# Altium PCB merigold_v3.PcbDoc
Units mm, origin at the board's own origin, x right, y up, seen from the top; angles counter-clockwise.
Board outline 99.57 x 99.57 mm, 2 copper layers (Top Layer, Bottom Layer); 21 components, 39 nets, 142 pads, 209 vias.
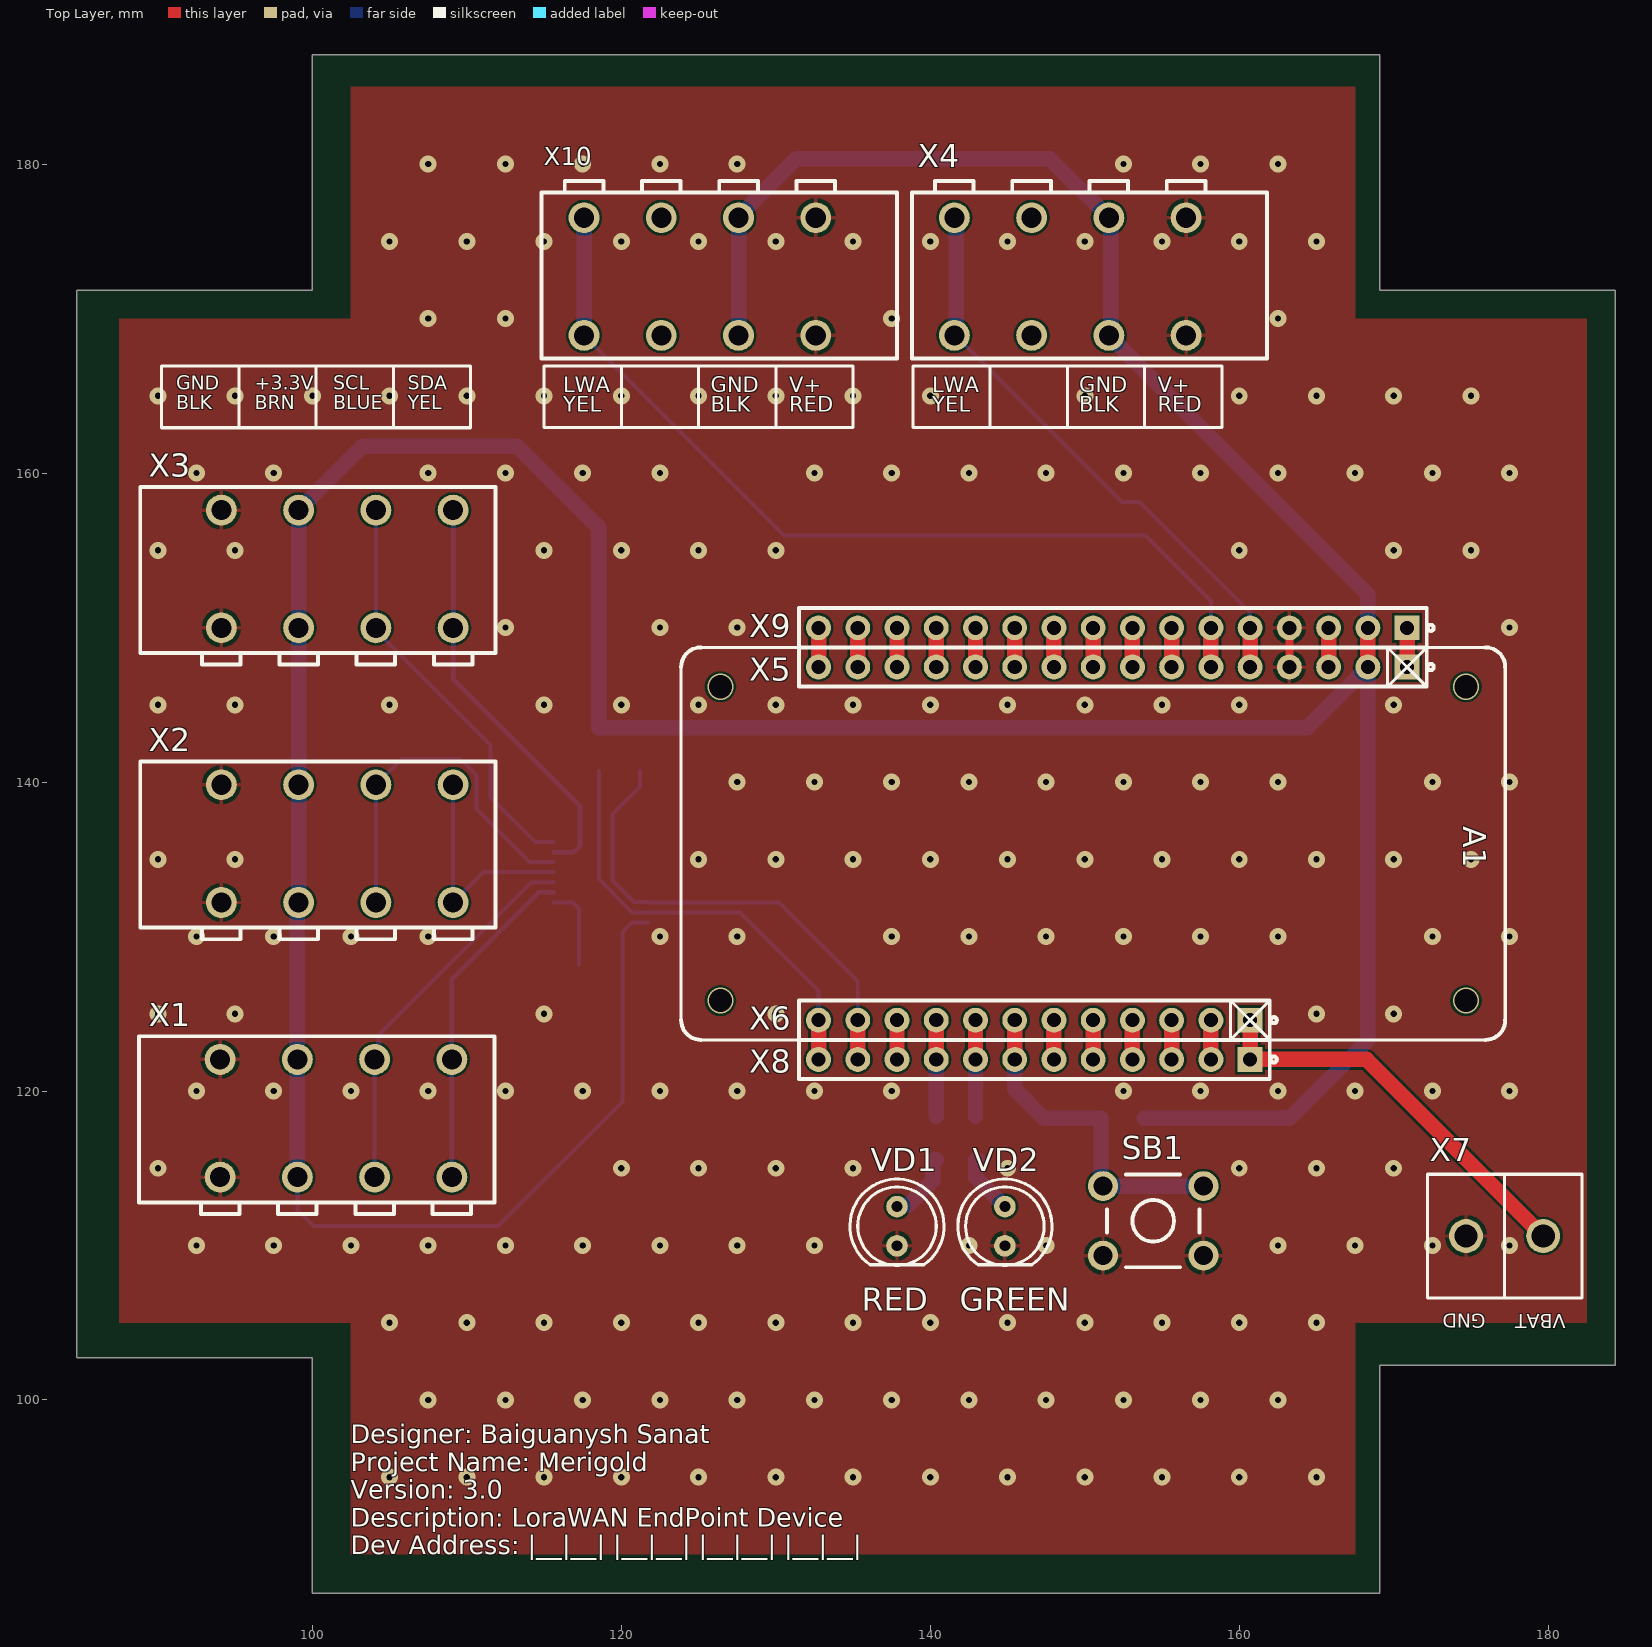
[diagram p0: Top Layer view]
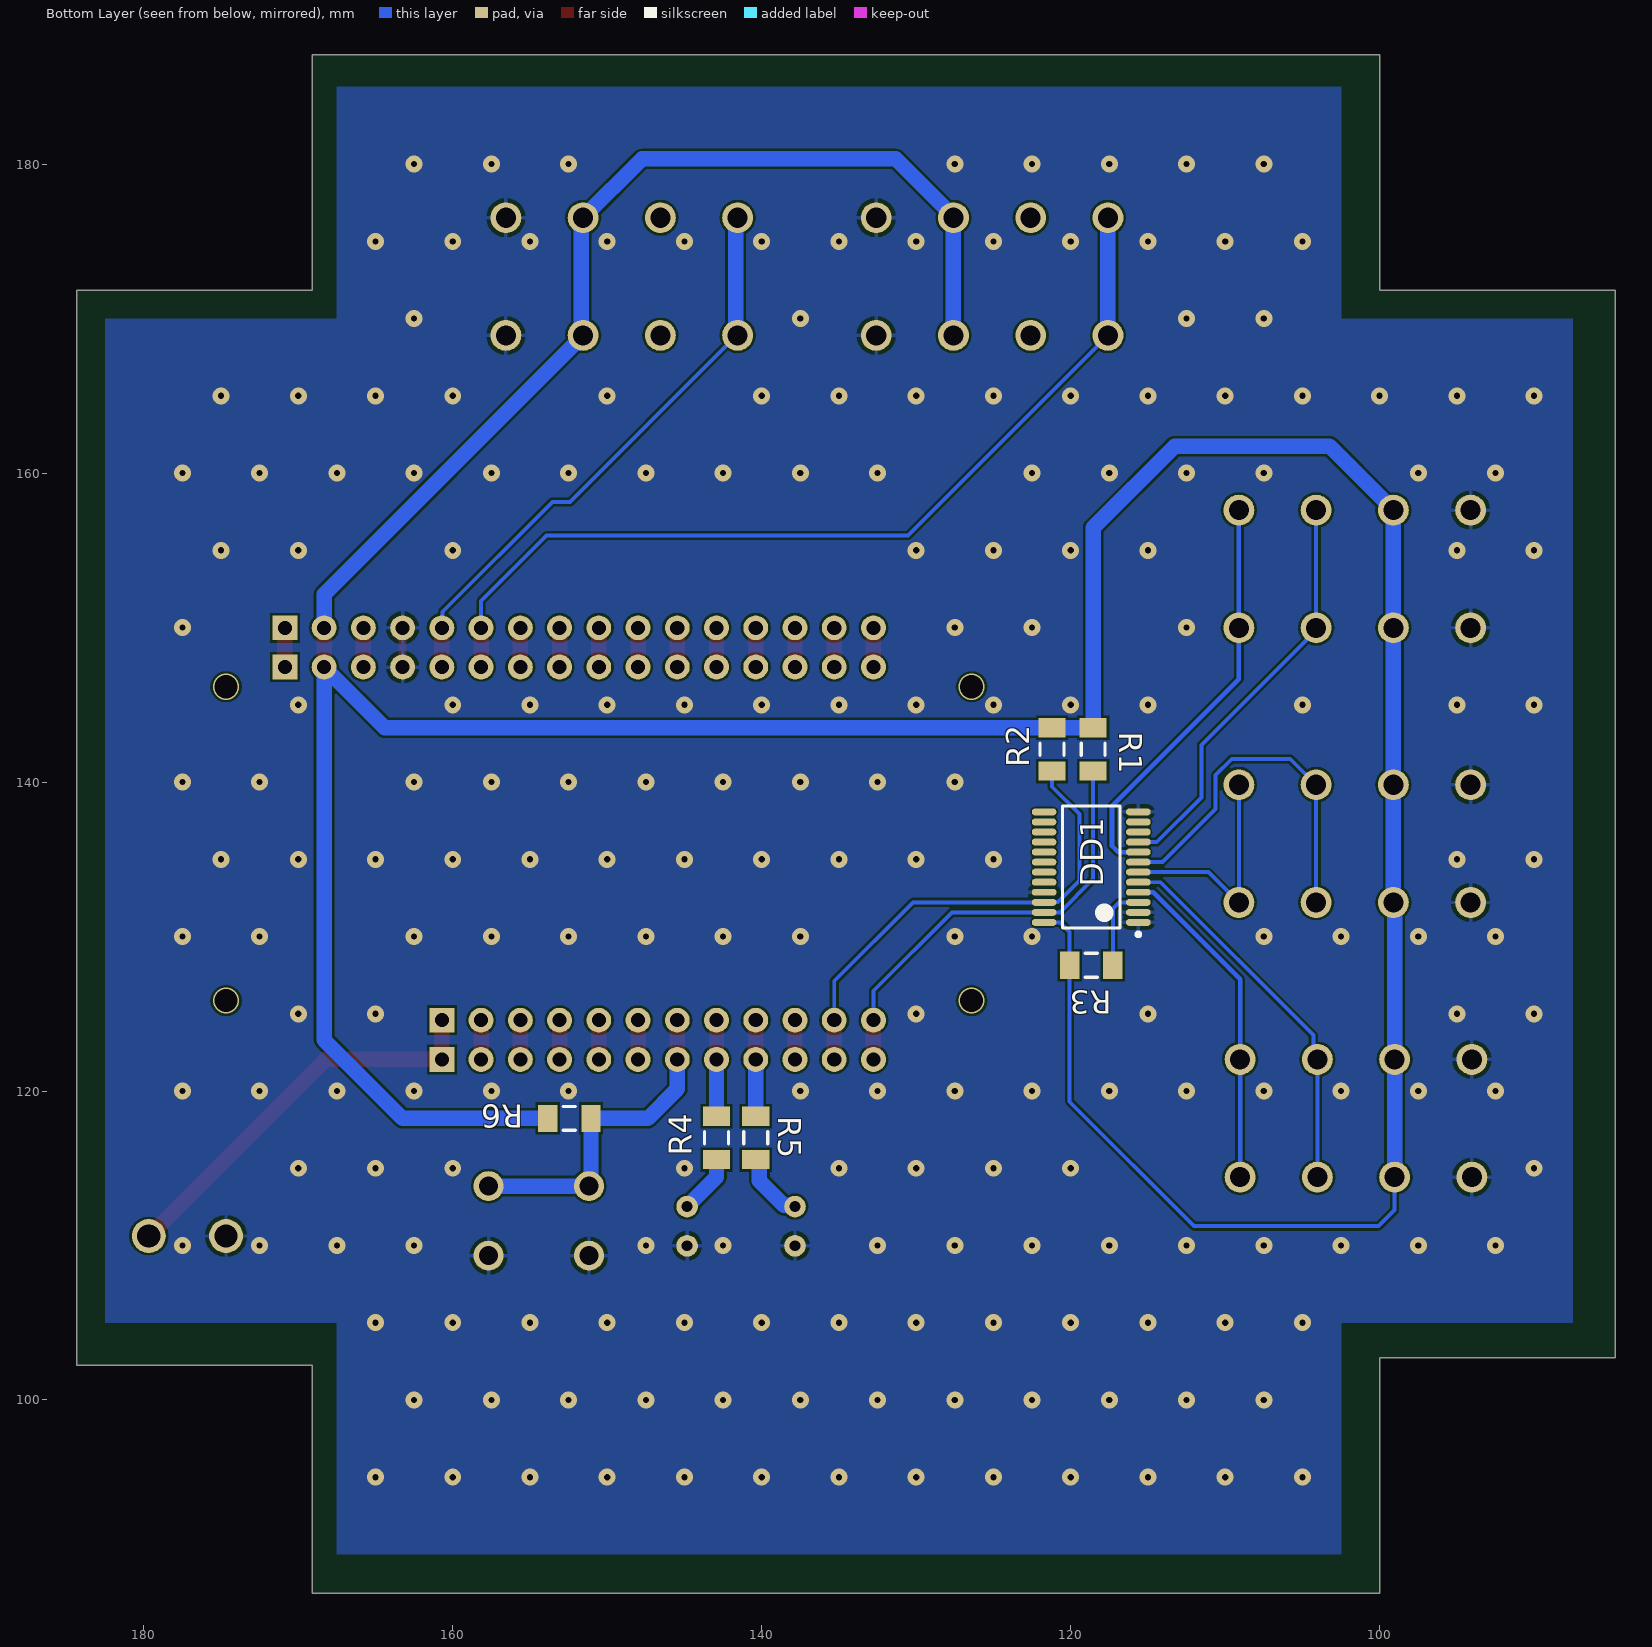
[diagram p1: Bottom Layer view, seen from below]

## Layer stack, top to bottom
Top Solder: solder mask 0.0102, Solder Resist, Dk 3.5
Top Layer: signal copper 0.0356
Dielectric 1: dielectric 0.32, FR-4, Dk 4.8
Bottom Layer: signal copper 0.0356
Bottom Solder: solder mask 0.0102, Solder Resist, Dk 3.5

## Board outline
84.76,102.74 100,102.74 100,87.5 169.088,87.5 169.088,102.232 184.328,102.232 184.328,171.828 169.088,171.828 169.088,187.068 100,187.068 100,171.828 84.76,171.828

## Design rules (kind name [scope] priority, off if disabled: settings)
Clearance Clearance_TSSOP [HasFootprint('TSOP65P640X120-24M')] p1: gap=0.1 ignorepadtopadclearanceinfootprint=FALSE
Clearance [All] p2: gap=0.15 ignorepadtopadclearanceinfootprint=FALSE
PlaneConnect [All] p1: pad.planeconnectstyle=Relief pad.reliefexpansion=0.508 pad.reliefentries=4 pad.reliefconductorwidth=0.254 pad.reliefairgap=0.254 via.planeconnectstyle=Direct via.reliefexpansion=0.508 via.reliefentries=4 via.reliefconductorwidth=0.254 via.reliefairgap=0.254
PolygonConnect [All] p1: thpad.connectstyle=Relief thpad.reliefconductorwidth=0.254 thpad.reliefentries=4 thpad.polygonreliefangle="90 Angle" thpad.airgapwidth=0.254 smdpad.connectstyle=Relief smdpad.reliefconductorwidth=0.254 smdpad.reliefentries=4 smdpad.polygonreliefangle="90 Angle" smdpad.airgapwidth=0.254 via.connectstyle=Direct via.reliefconductorwidth=0.254 via.reliefentries=4 via.polygonreliefangle="90 Angle" via.airgapwidth=0.254
RoomDefinition merigold [InComponentClass('merigold')] p1: confinementstyle=ConfineIn formatcopy=TRUE lockcomponents=FALSE outline 74.117,79.499 191.237,79.499 191.237,193.113 74.117,193.113
RoutingVias [All] p1: holewidth=0.711 width=1.27 viastyle="Through Hole" minholewidth=0.4 minwidth=1.1 maxholewidth=0.711 maxwidth=1.27
SolderMaskExpansion [All] p1: expansion=0.102 istentingtop=FALSE
Width [All] p1: maxlimit=5 minlimit=0.254 preferedwidth=0.254
29 further rules are at their usual default settings.

## Components (designator, comment, footprint, x,y, rotation, side; value= is the part's Value field where it differs from the comment)
A1 "LORA32U4 II" "LORA32U4 II" 170.866,147.444 r270 top
DD1 "TCA9548A" TSOP65P640X120-24M 118.669,134.49 r0 bottom
R1 "10K1206" RESC3216X07N/1206 118.542,142.11 r90 bottom
R2 "10K1206" RESC3216X07N/1206 121.209,142.11 r90 bottom
R3 "10K1206" RESC3216X07N/1206 118.669,128.14 r0 bottom
R4 "200R1206" RESC3216X07N/1206 142.926,116.964 r90 bottom
R5 "200R1206" RESC3216X07N/1206 140.386,116.964 r90 bottom
R6 "10K1206" RESC3216X07N/1206 152.451,118.234 r0 bottom
SB1 "BTN_TACTILE_6X6" BTN_TACTILE_6X6 157.681,109.344 r180 top
VD1 "LED_SSL-LX5093GD-TR26" LED500 137.846,112.519 r270 top
VD2 "LED_SSL-LX5093GD-TR26" LED500 144.831,112.519 r270 top
X1 "MOLEX_0397000904" MOLEX_0397000904 109.031,122.044 r180 top
X2 "MOLEX_0397000904" MOLEX_0397000904 109.111,139.824 r180 top
X3 "MOLEX_0397000904" MOLEX_0397000904 109.111,157.604 r180 top
X4 "MOLEX_0397000904" MOLEX_0397000904 141.558,168.91 r0 top
X5 "PLS_16_FEMALE" PLS_16_FEMALE 170.866,147.444 r270 top
X6 "PLS_12_FEMALE" PLS_12_FEMALE 160.706,124.584 r270 top
X7 "2EDGV-5.0-02P" 2EDGV-5.0-02P 179.676,110.614 r180 top
X8 "PLS_12_FEMALE" PLS_12_FEMALE 160.706,122.044 r270 top
X9 "PLS_16_FEMALE" PLS_16_FEMALE 170.866,149.984 r270 top
X10 "MOLEX_0397000904" MOLEX_0397000904 117.588,168.91 r0 top

## Footprints (in the part's own frame and the unit in brackets; to place one, negate y for a bottom-side part, rotate by r counter-clockwise, add the part's x,y. Pads: shape width x height; smd on the part's side, far side on the other; paste and mask are expansions set on the pad)
2EDGV-5.0-02P [mm]
  round 2.2 hole 1.5: 1(0,0) 2(5,0)
  silkscreen extent -2.5,-4 7.5,4, body extent -2.5,-4 7.5,4, height 12
BTN_TACTILE_6X6 [mm] "SWITCH TACTILE SPST-NO 0.05A 24V"
  round 1.94 hole 1.24: 1(0,0) 2(6.5,0) 3(0,-4.5) 4(6.5,-4.5)
  silkscreen extent 0.25,-5.25 6.25,0.75, body extent 0.25,-5.25 6.25,0.75, height 8
LED500 [mm]
  round 1.4 hole 0.7: A(0,0) K(2.54,0)
  silkscreen extent -1.77,-3.05 3.81,3.05, body extent -1.73,-3 4.27,3, height 8.6
"LORA32U4 II" [mm]
  silkscreen extent -1.27,-46.99 24.13,6.35, body extent -1.27,-46.99 24.13,7.62, height 5
MOLEX_0397000904 [mm] "TERM BLK 4POS TOP ENTRY 5MM PCB"
  round 2 hole 1.3: 1(0,7.62) 1(0,0) 2(5,7.62) 2(5,0) 3(10,7.62) 3(10,0) 4(15,0) 4(15,7.62)
  silkscreen extent -2.75,-1.5 20.25,10, body extent -2.5,-1.25 20,10, height 14
PLS_12_FEMALE [mm]
  rect 1.61x1.61 hole 0.91: 1(0,0)
  round 1.61 hole 0.91: 2(0,-2.54) 3(0,-5.08) 4(0,-7.62) 5(0,-10.16) 6(0,-12.7) 7(0,-15.24) 8(0,-17.78) 9(0,-20.32) 10(0,-22.86) 11(0,-25.4) 12(0,-27.94)
  silkscreen extent -1.27,-29.21 1.27,1.72, body extent -1.27,-29.21 1.27,1.27, height 8.5
PLS_16_FEMALE [mm]
  rect 1.61x1.61 hole 0.91: 1(0,0)
  round 1.61 hole 0.91: 2(0,-2.54) 3(0,-5.08) 4(0,-7.62) 5(0,-10.16) 6(0,-12.7) 7(0,-15.24) 8(0,-17.78) 9(0,-20.32) 10(0,-22.86) 11(0,-25.4) 12(0,-27.94) 13(0,-30.48) 14(0,-33.02) 15(0,-35.56) 16(0,-38.1)
  silkscreen extent -1.27,-39.37 1.27,1.72, body extent -1.27,-39.37 1.27,1.27, height 8.5
RESC3216X07N/1206 [mm] "Chip Resistor, 2-Leads, Body 3,20x1,60mm, IPC Medium Density"
  rect 1.25x1.75 smd: 1(-1.4,0) 2(1.4,0)
  silkscreen extent -0.4,-0.77 0.4,0.77, body extent -1.68,-0.87 1.68,0.87, height 0.71
TSOP65P640X120-24M [mm] "TSOP, 24-Leads, Body 7,80x4,40mm, Pitch 0,65mm, IPC Low Density"
  oval 1.6x0.45 smd: 1(-3.05,3.575) 2(-3.05,2.925) 3(-3.05,2.275) 4(-3.05,1.625) 5(-3.05,0.975) 6(-3.05,0.325) 7(-3.05,-0.325) 8(-3.05,-0.975) 9(-3.05,-1.625) 10(-3.05,-2.275) 11(-3.05,-2.925) 12(-3.05,-3.575) 13(3.05,-3.575) 14(3.05,-2.925) 15(3.05,-2.275) 16(3.05,-1.625) 17(3.05,-0.975) 18(3.05,-0.325) 19(3.05,0.325) 20(3.05,0.975) 21(3.05,1.625) 22(3.05,2.275) 23(3.05,2.925) 24(3.05,3.575)
  silkscreen extent -3.17,-3.95 1.85,4.47, body extent -2.25,-3.95 2.25,3.95, height 1.2

## Part data
A1: "LORA 32U4 II 868MHZ", Manufacturer=BSFrance, Manufacturer Part Number="Lora32U4 II ver 1.2", TH=1
DD1: "IC I2C SW 8CH W/RESET 24TSSOP", Manufacturer="Texas Instruments", Manufacturer Part Number=TCA9548APWR
R1 R2 R3 R6: "RES SMD 10K OHM 1% 1/4W 1206", Manufacturer=Panasonic, Manufacturer Part Number=ERJ8ENF1002V, Rated Power="0.25 W", Resistance="10 kO", Tolerance (%)="±1 %"
R4 R5: "RES SMD 200 OHM 1% 1/4W 1206", Manufacturer="Vishay Dale", Manufacturer Part Number=CRCW1206200RFKEA
SB1: "SWITCH TACTILE SPST-NO 0.05A 24V", Manufacturer="TE Connectivity Alcoswitch", Manufacturer Part Number=1825910-6, Pole Throw Configuration=SPST
VD1 VD2: "LED GREEN DIFFUSED T-1 3/4 T/H", Manufacturer=Lumex, Manufacturer Part Number=SSL-LX5093GD-TR26
X1 X2 X3 X4 X10: "TERM BLK 4POS TOP ENTRY 5MM PCB", Manufacturer=Molex, Manufacturer Part Number=0397000904, Supplier Part Number 1=WM10641-ND, Supplier 1=Digi-Key
X5 X9: "CONN RCPT 16POS 0.1 GOLD PCB", Manufacturer="TE Connectivity AMP Connectors", Manufacturer Part Number=1-534237-4, TH=1
X6 X8: "CONN RCPT 12POS 0.1 GOLD PCB", Manufacturer="TE Connectivity AMP Connectors", Manufacturer Part Number=1-534237-0, TH=1
X7: "TERM BLOCK HDR 2POS VERT 5MM", Manufacturer="Phoenix Contact", Manufacturer Part Number=1753437

## Via types
v1: diameter 1.1, hole 0.4, Top Layer to Bottom Layer, tented both sides, 205 vias
v2: diameter 1.7, hole 1.5, Top Layer to Bottom Layer, 4 vias

## Nets (pads, with @x,y where several pads share a name; then routed paths per layer and width w, separated by ;. In a path a pad name is that pad's centre, name@x,y a point inside that pad or via, vN(x,y) a via of type N, cw(c..) or ccw(c..) an arc to the next point about the centre after c; other vN are vias at no path point)
+3V3: DD1.24 R1.2 R2.2 R3.2 R6.2 X1.3 X2.3 X3.3 X4.3 X5.2 X9.2 X10.3 | length 282.4
  Top Layer w1: X5.2 X9.2
  Bottom Layer w0.254: X1.3@99.031,114.424 99.031,112.297 100.076,111.252 112.014,111.252 120.069,119.307 R3.2 120.069,130.302 120.682,130.915 DD1.24
  Bottom Layer w1: X1.3@99.031,114.424 99.031,122.044 99.031,132.124 99.111,132.204 99.111,139.824 99.111,149.984 99.111,157.604 103.251,161.744 113.259,161.744 118.542,156.461 R1.2 R2.2 164.392,143.51 X5.2 168.326,123.314 163.246,118.234 R6.2 ; X10.3@127.588,168.91 127.588,176.53 127.588,176.61 131.318,180.34 147.748,180.34 X4.3@151.558,176.53 ; X4.3@151.558,168.91 168.326,152.142 X9.2 ; X4.3@151.689,168.653 X4.3@151.689,176.4
A1: X5.6 X9.6 X10.1 | length 59.6
  Top Layer w1: X5.6 X9.6
  Bottom Layer w0.254: X10.1@117.588,168.91 130.542,155.956 153.924,155.956 158.166,151.714 X9.6
  Bottom Layer w1: X10.1@117.588,168.91 X10.1@117.588,176.53
BTN: R6.1 SB1.3 SB1.4 X6.7 X8.7 | length 21.8
  Top Layer w1: X8.7 X6.7
  Bottom Layer w1: X8.7 145.466,120.139 147.371,118.234 R6.1 151.051,113.974 SB1.4 SB1.3
GND: DD1.1 DD1.2 DD1.12 DD1.21 SB1.1 SB1.2 VD1.K VD2.K X1.4 X2.4 X3.4 X4.4 X5.4 X7.2 X9.4 X10.4 | length 2.5
  Top Layer w0.5: X5.4 X9.4
  other v1: 105,95 110,95 115,95 120,95 125,95 130,95 135,95 140,95 145,95 150,95 155,95 160,95 165,95 107.5,100 112.5,100 117.5,100 122.5,100 127.5,100 132.5,100 137.5,100 142.5,100 147.5,100 152.5,100 157.5,100 162.5,100 105,105 110,105 115,105 120,105 125,105 130,105 135,105 140,105 145,105 150,105 155,105 160,105 165,105 92.5,110 97.5,110 102.5,110 107.5,110 112.5,110 117.5,110 122.5,110 127.5,110 132.5,110 142.5,110 147.5,110 162.5,110 167.5,110 172.5,110 177.5,110 90,115 120,115 125,115 130,115 135,115 145,115 160,115 165,115 170,115 92.5,120 97.5,120 102.5,120 107.5,120 112.5,120 117.5,120 122.5,120 127.5,120 132.5,120 137.5,120 152.5,120 157.5,120 162.5,120 167.5,120 172.5,120 177.5,120 90,125 95,125 115,125 130,125 165,125 170,125 92.5,130 97.5,130 102.5,130 107.5,130 122.5,130 127.5,130 137.5,130 142.5,130 147.5,130 152.5,130 157.5,130 162.5,130 172.5,130 177.5,130 90,135 95,135 125,135 130,135 135,135 140,135 145,135 150,135 155,135 160,135 165,135 170,135 175,135 127.5,140 132.5,140 137.5,140 142.5,140 147.5,140 152.5,140 157.5,140 162.5,140 172.5,140 177.5,140 90,145 95,145 105,145 115,145 120,145 125,145 130,145 135,145 140,145 145,145 150,145 155,145 160,145 170,145 112.5,150 122.5,150 127.5,150 177.5,150 90,155 95,155 115,155 120,155 125,155 130,155 160,155 170,155 175,155 92.5,160 97.5,160 107.5,160 112.5,160 117.5,160 122.5,160 132.5,160 137.5,160 142.5,160 147.5,160 152.5,160 157.5,160 162.5,160 167.5,160 172.5,160 177.5,160 90,165 95,165 100,165 105,165 110,165 115,165 120,165 125,165 130,165 135,165 140,165 150,165 160,165 165,165 170,165 175,165 107.5,170 112.5,170 137.5,170 162.5,170 105,175 110,175 115,175 120,175 125,175 130,175 135,175 140,175 145,175 150,175 155,175 160,175 165,175 107.5,180 112.5,180 117.5,180 122.5,180 127.5,180 152.5,180 157.5,180 162.5,180
GREEN: R4.2 X6.8 X8.8 | length 6.2
  Top Layer w1: X8.8 X6.8
  Bottom Layer w1: R4.2 X8.8
LEAF_WETNESS_ANALOG: X4.1 X5.5 X9.5 | length 37.7
  Top Layer w1: X5.5 X9.5
  Bottom Layer w0.254: X4.1@141.558,168.91 141.624,168.91 141.689,168.845 152.407,158.126 153.554,158.126 160.659,151.021 160.659,150.031 X9.5
  Bottom Layer w1: X4.1@141.689,168.78 141.689,168.845 X4.1@141.689,176.4
NetDD1_3: DD1.3 R3.1 | length 5.5
  Bottom Layer w0.254: DD1.3 116.88,132.215 117.269,131.826 R3.1
NetR4_1: R4.1 VD2.A | length 4.1
  Bottom Layer w1: R4.1@143.167,115.439 143.042,115.564 R4.1 142.926,114.424 VD2.A
NetR5_1: R5.1 VD1.A | length 4.5
  Bottom Layer w1: VD1.A 137.923,112.596 138.558,112.596 140.145,114.183 140.145,115.439 140.27,115.564 R5.1
NetX5_1: X5.1 X9.1 | length 2.5
  Top Layer w1: X5.1 X9.1
NetX5_3: X5.3 X9.3 | length 2.5
  Top Layer w1: X5.3 X9.3
NetX5_7: X5.7 X9.7 | length 2.5
  Top Layer w1: X5.7 X9.7
NetX5_8: X5.8 X9.8 | length 2.5
  Top Layer w1: X5.8 X9.8
NetX5_9: X5.9 X9.9 | length 2.5
  Top Layer w1: X5.9 X9.9
NetX5_10: X5.10 X9.10 | length 2.5
  Top Layer w1: X5.10 X9.10
NetX5_11: X5.11 X9.11 | length 2.5
  Top Layer w1: X5.11 X9.11
NetX5_12: X5.12 X9.12 | length 2.5
  Top Layer w1: X5.12 X9.12
NetX5_13: X5.13 X9.13 | length 2.5
  Top Layer w1: X5.13 X9.13
NetX5_14: X5.14 X9.14 | length 2.5
  Top Layer w1: X5.14 X9.14
NetX5_15: X5.15 X9.15 | length 2.5
  Top Layer w1: X5.15 X9.15
NetX5_16: X5.16 X9.16 | length 2.5
  Top Layer w1: X5.16 X9.16
NetX6_2: X6.2 X8.2 | length 2.5
  Top Layer w1: X8.2 X6.2
NetX6_3: X6.3 X8.3 | length 2.5
  Top Layer w1: X8.3 X6.3
NetX6_4: X6.4 X8.4 | length 2.5
  Top Layer w1: X8.4 X6.4
NetX6_5: X6.5 X8.5 | length 2.5
  Top Layer w1: X8.5 X6.5
NetX6_6: X6.6 X8.6 | length 2.5
  Top Layer w1: X8.6 X6.6
NetX6_10: X6.10 X8.10 | length 2.5
  Top Layer w1: X8.10 X6.10
RED: R5.2 X6.9 X8.9 | length 6.2
  Top Layer w1: X8.9 X6.9
  Bottom Layer w1: R5.2 X8.9
SCL: DD1.22 R2.1 X6.11 X8.11 | length 31.5
  Top Layer w1: X8.11 X6.11
  Bottom Layer w0.254: R2.1 121.209,139.697 119.431,137.919 119.431,133.622 120.817,132.237 121.697,132.237 DD1.22 130.215,132.215 135.306,127.124 X6.11
SCL0: DD1.5 X1.2 | length 24.7
  Bottom Layer w0.254: X1.2@104.031,114.424 104.031,122.044 104.293,122.306 104.293,123.619 114.189,133.515 DD1.5
SCL1: DD1.7 X2.2 | length 23.9
  Bottom Layer w0.254: X2.2@104.111,132.204 104.111,139.824 105.787,141.5 109.576,141.5 110.617,140.459 110.617,138.249 114.051,134.815 DD1.7
SCL2: DD1.9 X3.2 | length 27
  Bottom Layer w0.254: X3.2@104.111,157.604 104.111,149.984 104.111,149.81 111.532,142.389 111.532,139.011 114.428,136.115 DD1.9
SCL3: DD1.11
SDA: DD1.23 R1.1 X6.12 X8.12 | length 28.6
  Top Layer w1: X8.12 X6.12
  Bottom Layer w0.254: R1.1 118.542,133.728 120.705,131.565 DD1.23 127.69,131.565 132.766,126.489 X6.12
SDA0: DD1.4 X1.1 | length 21.7
  Bottom Layer w0.3: X1.1@109.031,114.424 109.031,122.044 109.031,127.24 114.656,132.865 DD1.4
SDA1: DD1.6 X2.1 | length 14.9
  Bottom Layer w0.254: X2.1@109.111,139.824 109.111,132.204 111.072,134.165 DD1.6
SDA2: DD1.8 X3.1 | length 27
  Bottom Layer w0.3: X3.1@109.111,157.604 109.111,149.984 109.111,146.664 117.323,138.452 117.323,135.862 116.926,135.465 DD1.8
SDA3: DD1.10
VBAT: X6.1 X7.1 X8.1 | length 26.2
  Top Layer w1: X6.1 X8.1 168.246,122.044 X7.1
pads on no net: DD1.13 DD1.14 DD1.15 DD1.16 DD1.17 DD1.18 DD1.19 DD1.20 X4.2 X10.2
copper on no net:
  other v2: 126.416,125.854 174.676,125.854 126.416,146.174 174.676,146.174

## Polygon pours and split planes (outlines as drawn)
GND on Bottom Layer "Top Overlay-No Net" (solid, pour order 0): 87.5,105 102.5,105 102.5,90 167.5,90 167.5,105 182.5,105 182.5,170 167.5,170 167.5,185 102.5,185 102.5,170 87.5,170
GND on Top Layer "Top Overlay-No Net" (solid, pour order 1): 87.5,105 102.5,105 102.5,90 167.5,90 167.5,105 182.5,105 182.5,170 167.5,170 167.5,185 102.5,185 102.5,170 87.5,170

## Silkscreen, mask and mechanical layers (free items; w line width, h text height)
Top Overlay:
  lines w0.2: 95.241,162.934 95.241,166.934 ; 100.241,162.934 100.241,166.934 ; 105.241,162.934 105.241,166.934 ; 120.002,162.937 120.002,166.937 ; 125.002,162.937 125.002,166.937 ; 130.002,162.937 130.002,166.937 ; 143.878,162.937 143.878,166.937 ; 148.878,162.937 148.878,166.937 ; 153.878,162.937 153.878,166.937 ; 90.241,162.934 110.241,162.934 110.241,166.934 90.241,166.934 90.241,162.934 ; 115.002,162.937 135.002,162.937 135.002,166.937 115.002,166.937 115.002,162.937 ; 138.878,162.937 138.878,166.937 158.878,166.937 158.878,162.937 138.878,162.937
  text "LWA" at 116.252,165.227 h1
  text "GND" at 125.777,165.227 h1
  text "V+" at 130.857,165.227 h1
  text "LWA" at 140.128,165.227 h1
  text "GND" at 149.653,165.227 h1
  text "V+" at 154.733,165.227 h1
  text "GND" at 91.186,165.1 h1.52
  text "+3.3V" at 96.266,165.1 h1.52
  text "SCL" at 101.346,165.1 h1.52
  text "SDA" at 106.172,165.1 h1.52
  text "YEL" at 116.252,163.957 h1
  text "BLK" at 125.777,163.957 h1
  text "RED" at 130.857,163.957 h1
  text "YEL" at 140.128,163.957 h1
  text "BLK" at 149.653,163.957 h1
  text "RED" at 154.733,163.957 h1
  text "BLK" at 91.186,163.83 h1.52
  text "BRN" at 96.266,163.83 h1.52
  text "BLUE" at 101.346,163.83 h1.52
  text "YEL" at 106.172,163.83 h1.52
  text "GND" at 175.971,105.864 h1.52 r180
  text "VBAT" at 181.128,105.839 h1.52 r180
  text "RED" at 135.56,105.788 h1.5
  text "GREEN" at 141.91,105.788 h1.5
  text "Designer: Baiguanysh Sanat / Project Name: Merigold / Version: 3.0 / Description: LoraWAN EndPoint Device / Dev Address: |__|__| |__|__| |__|__| |__|__|" at 102.5,90 h1.2
Board:
  the board outline again, w0.5